# EAGLE board garden_circ (EAGLE 6.4)
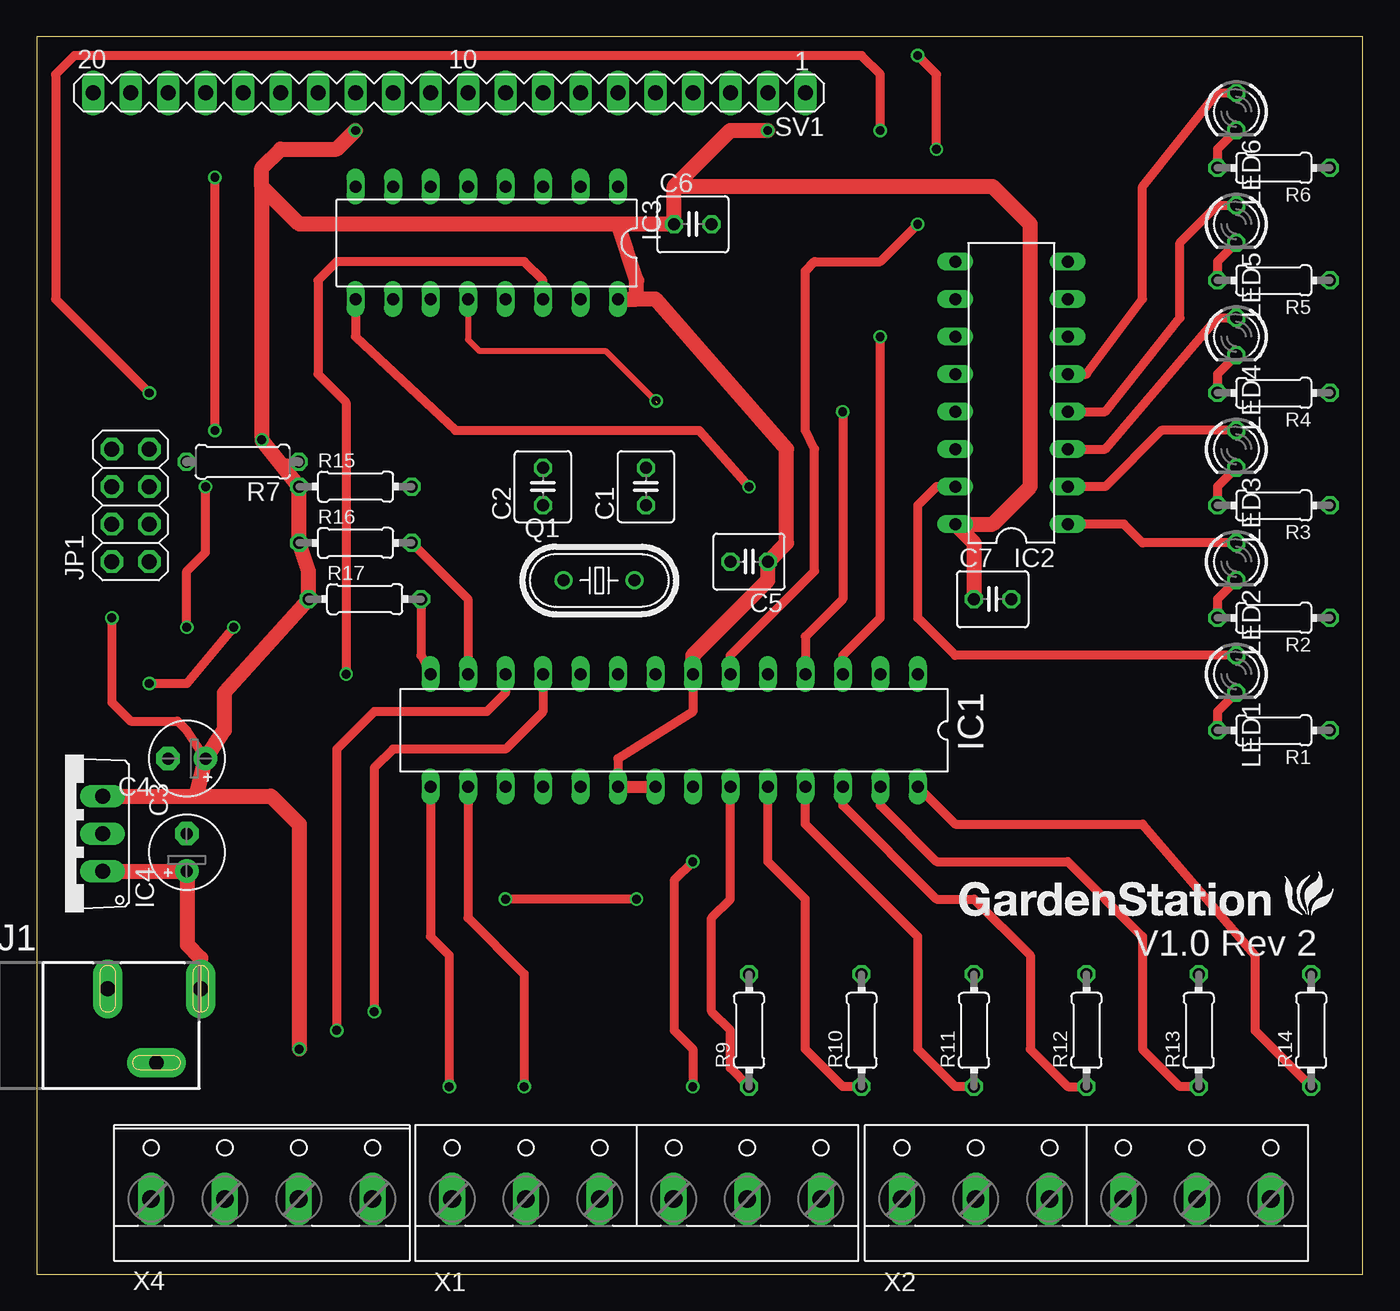
[diagram p0: board, top side]
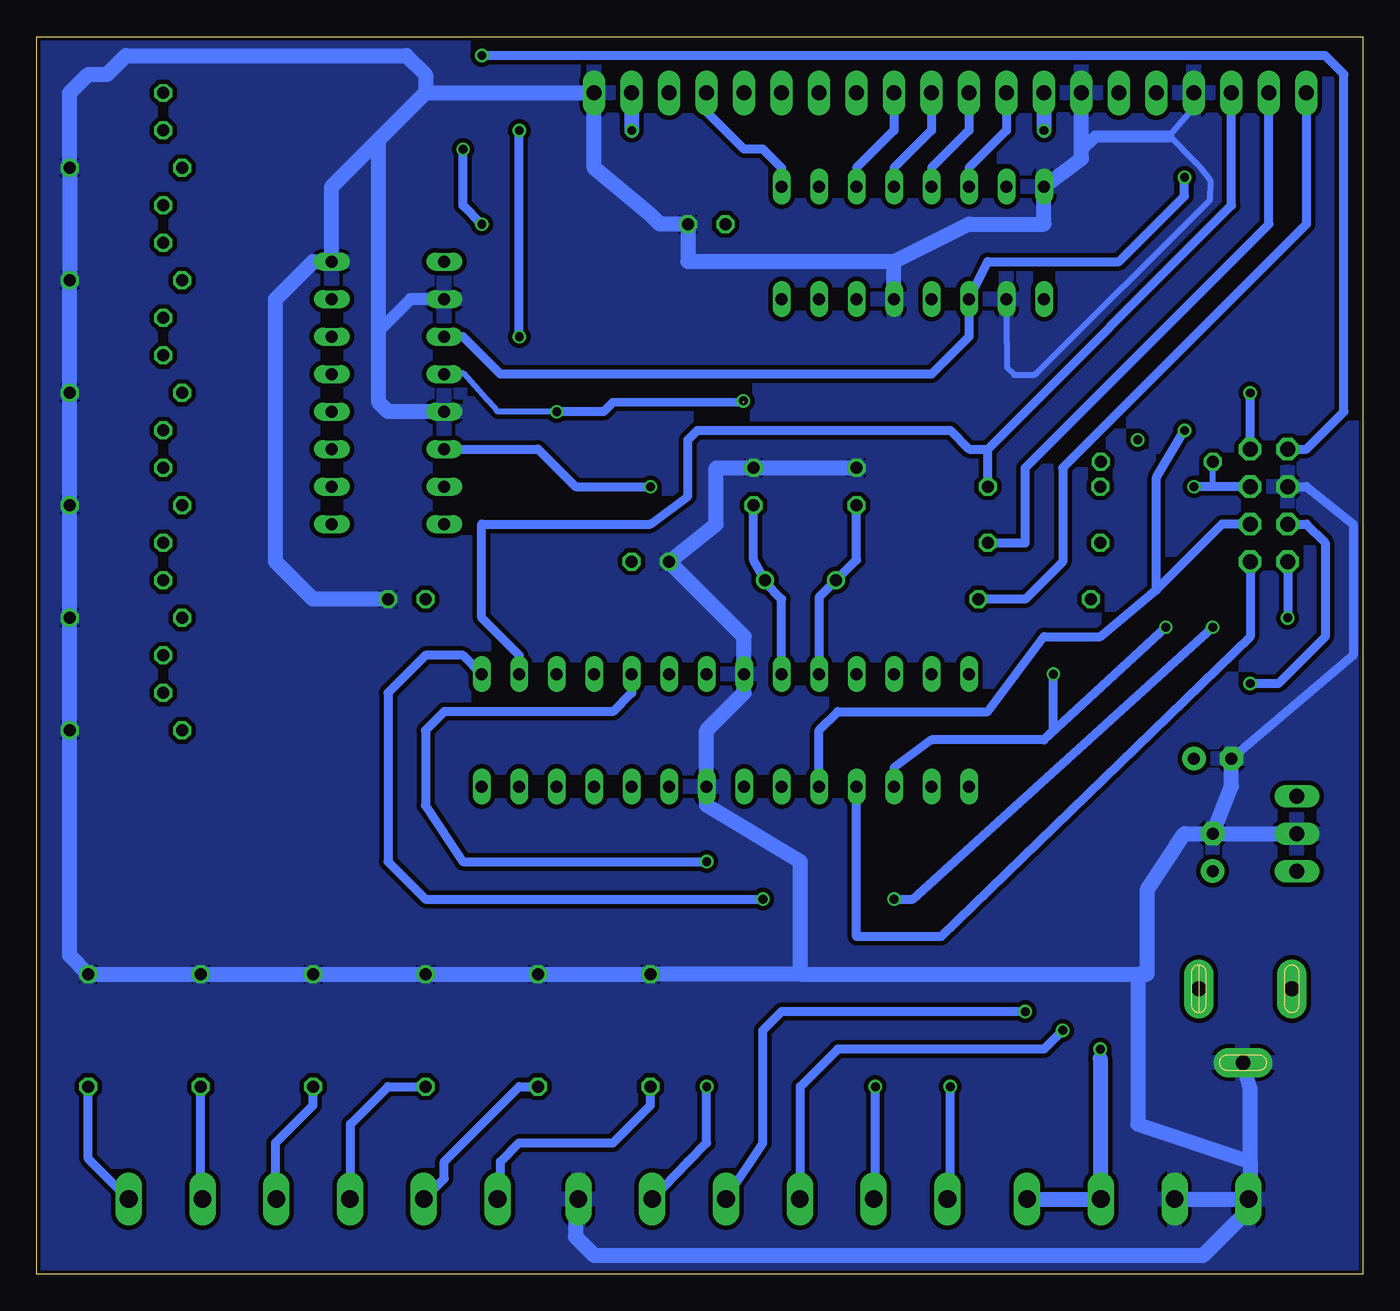
[diagram p1: board, bottom side, seen from below]

Size 89.84 x 83.81 mm. Coordinates in mm from the lower left corner, seen from the top.
Outline: 0,0 89.84,0 89.84,83.81 0,83.81 0,0
Copper layers (1*2*15*16): Top 0.035mm / dielectric 0.2mm / layer 2 0.0175mm / dielectric 1.1mm / layer 15 0.0175mm / dielectric 0.2mm / Bottom 0.035mm
Design rules "seeds_bigger": minimum track width 6mil, minimum drill 12mil, track to track 12mil, track to pad 12mil, pad to pad 12mil, via to via 12mil, smd to smd 0mil, copper to edge 10mil, drill to drill 10mil, minimum pad ring 6mil, minimum via ring 6mil, stop-mask expansion 2mil, vias tented up to drill 25mil, thermal gap 10mil

## Footprints (pad centres in the part's own frame; a part is rotated, then mirrored left to right if it is on the bottom)
C025-040X050 = drill 0.813 octagon: 1 -1.27,0; 2 1.27,0
E2,5-5 = drill 0.813 pad 1.6: + -1.27,0 | drill 0.813 pad 1.6 octagon: - 1.27,0
DIL28-3 = drill 0.813 long: 1 -16.51,-3.81; 2 -13.97,-3.81; 3 -11.43,-3.81; 4 -8.89,-3.81; 5 -6.35,-3.81; 6 -3.81,-3.81; 7 -1.27,-3.81; 8 1.27,-3.81; 9 3.81,-3.81; 10 6.35,-3.81; 11 8.89,-3.81; 12 11.43,-3.81; 13 13.97,-3.81; 14 16.51,-3.81; 15 16.51,3.81; 16 13.97,3.81; 17 11.43,3.81; 18 8.89,3.81; 19 6.35,3.81; 20 3.81,3.81; 21 1.27,3.81; 22 -1.27,3.81; 23 -3.81,3.81; 24 -6.35,3.81; 25 -8.89,3.81; 26 -11.43,3.81; 27 -13.97,3.81; 28 -16.51,3.81
DIL16 = drill 0.813 long: 1 -8.89,-3.81; 2 -6.35,-3.81; 3 -3.81,-3.81; 4 -1.27,-3.81; 5 1.27,-3.81; 6 3.81,-3.81; 7 6.35,-3.81; 8 8.89,-3.81; 9 8.89,3.81; 10 6.35,3.81; 11 3.81,3.81; 12 1.27,3.81; 13 -1.27,3.81; 14 -3.81,3.81; 15 -6.35,3.81; 16 -8.89,3.81
TO220V = drill 1.016 long: 1 -2.54,-2.54; 2 0,-2.54; 3 2.54,-2.54
POWER_JACK_SLOT = drill 1 pad 2 long: GND@1 2.58,7.5; GND@2 7.58,10.8; PWR 2.58,13.8
2X04 = drill 1.016 octagon: 1 -3.81,-1.27; 2 -3.81,1.27; 3 -1.27,-1.27; 4 -1.27,1.27; 5 1.27,-1.27; 6 1.27,1.27; 7 3.81,-1.27; 8 3.81,1.27
LED3MM = drill 0.813 octagon: A -1.27,0; K 1.27,0
HC49U-V = drill 0.813: 1 -2.413,0; 2 2.413,0
0204/7 = drill 0.813 octagon: 1 -3.81,0; 2 3.81,0
0207/7 = drill 0.813 octagon: 1 -3.81,0; 2 3.81,0
MA20-1 = drill 1.016 long: 1 -24.13,0; 2 -21.59,0; 3 -19.05,0; 4 -16.51,0; 5 -13.97,0; 6 -11.43,0; 7 -8.89,0; 8 -6.35,0; 9 -3.81,0; 10 -1.27,0; 11 1.27,0; 12 3.81,0; 13 6.35,0; 14 8.89,0; 15 11.43,0; 16 13.97,0; 17 16.51,0; 18 19.05,0; 19 21.59,0; 20 24.13,0
W237-136 = drill 1.194 long: 1 -12.5,-1.27; 2 -7.5,-1.27; 3 -2.5,-1.27; 4 2.5,-1.27; 5 7.5,-1.27; 6 12.5,-1.27
W237-4 = drill 1.194 long: 1 -7.5,-1.27; 2 -2.5,-1.27; 3 2.5,-1.27; 4 7.5,-1.27

## Placement (x,y rotation side)
C1  22pF  [C025-040X050]  41.28,53.34 90 top
C2  22pF  [C025-040X050]  34.29,53.34 90 top
C3  0.33uF  [E2,5-5]  10.16,28.57 90 top
C4  0.1uF  [E2,5-5]  10.16,34.92 180 top
C5  0.1uF  [C025-040X050]  48.26,48.26 180 top
C6  0.1uF  [C025-040X050]  44.45,71.12 0 top
C7  0.1uF  [C025-040X050]  64.77,45.72 0 top
IC1  MEGA8-P  [DIL28-3]  43.18,36.83 180 top
IC2  74HC595N  [DIL16]  66.04,59.69 90 top
IC3  74HC595N  [DIL16]  30.48,69.85 180 top
IC4  7805TV  [TO220V]  1.91,29.84 90 top
J1  POWER_JACKSLT  [POWER_JACK_SLOT]  -2.7,21.9 270 top
JP1  [2X04]  6.35,52.07 90 top
LED1  [LED3MM]  81.28,40.64 270 top
LED2  [LED3MM]  81.28,48.26 270 top
LED3  [LED3MM]  81.28,55.88 270 top
LED4  [LED3MM]  81.28,63.5 270 top
LED5  [LED3MM]  81.28,71.12 270 top
LED6  [LED3MM]  81.28,78.74 270 top
Q1  [HC49U-V]  38.1,46.99 0 top
R1  220  [0204/7]  83.82,36.83 180 top
R2  220  [0204/7]  83.82,44.45 180 top
R3  220  [0204/7]  83.82,52.07 180 top
R4  220  [0204/7]  83.82,59.69 180 top
R5  220  [0204/7]  83.82,67.31 180 top
R6  220  [0204/7]  83.82,74.93 180 top
R7  10K  [0207/7]  13.94,55.03 180 top
R9  10K  [0204/7]  48.26,16.51 90 top
R10  10K  [0204/7]  55.88,16.51 90 top
R11  10K  [0204/7]  63.5,16.51 90 top
R12  10K  [0204/7]  71.12,16.51 90 top
R13  10K  [0204/7]  78.74,16.51 90 top
R14  10K  [0204/7]  86.36,16.51 90 top
R15  10K  [0204/7]  21.59,53.34 0 top
R16  10K  [0204/7]  21.59,49.53 0 top
R17  10K  [0204/7]  22.22,45.72 0 top
SV1  [MA20-1]  27.94,80.01 180 top
X1  [W237-136]  40.64,6.35 0 top
X2  [W237-136]  71.12,6.35 0 top
X4  [W237-4]  15.24,6.35 0 top

## Library data of the parts
C1 C2 C5-C7 R1-R6 R9-R17 = rcl
C3 C4 R7 = resistor
IC1 = atmel; OC_FARNELL: unknown; OC_NEWARK: unknown
IC2 IC3 = 74xx-eu
IC4 = linear
J1 = SparkFun-Connectors
JP1 = pinhead
LED1-LED6 = led
Q1 = crystal; OC_FARNELL: 1666969; OC_NEWARK: unknown
SV1 = con-lstb; OC_FARNELL: unknown; OC_NEWARK: unknown
X1 X2 = con-wago-500; MPN: 237-136; OC_FARNELL: unknown; OC_NEWARK: 84K9151
X4 = con-wago-500; OC_FARNELL: unknown; OC_NEWARK: unknown

## Nets
GND: C1.2 C2.2 C3.- C4.- C5.2 C6.2 C7.2 IC1.8 IC1.22 IC2.8 IC2.10 IC2.13 IC3.8 IC3.10 IC3.13 IC4.2 J1.GND@2 JP1.6 R1.1 R2.1 R3.1 R4.1 R5.1 R6.1 R9.2 R10.2 R11.2 R12.2 R13.2 R14.2 SV1.1 SV1.14 SV1.17 X1.6 X4.1 X4.2
N$1: C1.1 IC1.9 Q1.2
N$2: C2.1 IC1.10 Q1.1
N$3: LED1.K R1.2
N$4: LED2.K R2.2
N$5: LED3.K R3.2
N$6: LED4.K R4.2
N$7: LED5.K R5.2
N$8: LED6.K R6.2
N$9: IC1.18 JP1.1
N$10: IC1.1 JP1.5 R7.2
N$11: IC2.15 LED1.A
N$12: IC2.1 LED2.A
N$13: IC2.2 LED3.A
N$14: IC2.3 LED4.A
N$15: IC1.11 X1.4
N$16: IC2.4 LED5.A
N$17: IC2.5 LED6.A
N$19: IC1.6 JP1.8
N$20: IC1.19 IC2.11 IC3.11 JP1.3
N$21: IC2.14 IC3.9
N$23: IC1.12 X1.3
N$24: IC1.15 X1.1
N$25: IC1.24 R10.1 X2.2
N$26: IC3.3 SV1.9
N$27: IC3.1 SV1.4
N$28: IC3.4 SV1.10
N$29: IC3.5 SV1.11
N$30: IC3.6 SV1.12
N$31: IC1.23 R9.1 X2.1
N$32: IC1.25 R11.1 X2.3
N$33: IC1.26 R12.1 X2.4
N$34: IC1.27 R13.1 X2.5
N$35: IC1.28 R14.1 X2.6
N$36: IC1.16 X1.2
N$37: C3.+ IC4.1 J1.PWR
N$39: IC1.2 R15.2 SV1.18
N$40: IC1.13 R16.2 SV1.19
N$41: IC1.14 R17.2 SV1.20
N$42: IC1.5 X1.5
N$44: IC1.17 IC3.14 JP1.4
N$45: IC1.3 JP1.7
N$52: IC1.4 IC2.12 IC3.12
VCC: C4.+ C5.1 C6.1 C7.1 IC1.7 IC1.20 IC1.21 IC2.16 IC3.16 IC4.3 JP1.2 R7.1 R15.1 R16.1 R17.1 SV1.2 SV1.13 X4.3 X4.4

## Tracks (layer width: path | path; a pad name or v marks a point on that pad's centre or on a via)
GND
  Bottom 0.406: 11.43,79.06 13.1,77.1 | 13.1,77.1 13.16,77.06 | IC3.10 24.13,63.08 24.1,63.05 24.1,61.41 23.6,60.91 22.25,60.91 22.14,61.02 22.11,61.02 10.34,72.79 10.3,74.07 10.9,74.85 11.26,75.26 13.1,77.1
  Bottom 0.61: JP1.6 3.81,53.34 0.64,50.8 0.64,41.91 C4.-
  Bottom 0.813: 13.16,77.06 18.12,77.06 19.05,76.13 | IC2.10 64.52,66.04 66.67,63.88
  Bottom 1.016: 38.1,20.32 R9.2 R10.2 R11.2 R12.2 R13.2 R14.2 87.63,21.59 R1.1 R2.1 R3.1 R4.1 R5.1 R6.1 87.63,80.01 86.36,81.28 85.09,81.28 83.82,82.55 64.77,82.55 63.5,81.28 63.5,80.01 | 38.1,20.32 15.1,20.32 | 15.1,20.32 14.61,20.32 14.61,26.04 12.07,29.84 C3.- | C3.- IC4.2 | C3.- 8.89,33.02 C4.- | C2.2 C1.2 43.82,54.61 43.82,50.8 C5.2 41.91,43.18 IC1.8 41.91,39.37 44.45,36.83 IC1.22 44.45,31.75 38.1,27.94 38.1,20.32 | 31.75,68.58 26.67,71.12 21.59,71.12 IC3.8 19.05,75.56 19.05,76.13 SV1.14 | 7.62,7.62 15.24,10.16 15.24,20.18 15.1,20.32 | X1.6 53.34,4.88 53.34,2.54 52.07,1.27 10.79,1.27 7.62,4.45 7.62,4.96 X4.1 | 66.67,76.83 69.85,73.66 IC2.8 71.12,68.58 73.66,66.04 73.66,48.26 71.12,45.72 C7.2 | 66.67,76.83 63.5,80.01 | 63.5,80.01 SV1.1 52.07,74.93 48.26,71.75 47.62,71.12 C6.2 45.72,68.58 31.75,68.58 | IC2.13 66.04,58.42 66.67,59.05 66.67,63.88 66.67,76.83 | IC3.13 31.75,68.58 | 7.62,7.62 7.62,5.2 X4.1 | X4.2 X4.1 | SV1.17 11.43,79.06 | 7.62,7.62 7.62,12.56 J1.GND@2
  pour Bottom: 0,83.82 0,0 89.53,0 89.53,83.82
N$1
  Bottom 0.61: IC1.9 39.37,45.72 40.51,46.86 Q1.2 41.28,48.39 C1.1
N$2
  Bottom 0.61: IC1.10 36.83,45.85 Q1.1 34.29,48.39 C2.1
N$3
  Top 0.61: LED1.K 80.01,38.1 R1.2
N$4
  Top 0.61: LED2.K 80.01,45.72 R2.2
N$5
  Top 0.61: LED3.K 80.01,53.34 R3.2
N$6
  Top 0.61: LED4.K 80.01,60.96 R4.2
N$7
  Top 0.61: LED5.K 80.01,68.58 R5.2
N$8
  Top 0.61: LED6.K 80.01,76.2 R6.2
N$9
  Bottom 0.61: JP1.1 7.62,43.18 28.57,22.86 34.29,22.86 IC1.18
N$10  (via drill 0.6)
  Top 0.61: v40.64,25.4 v31.75,25.4 | v10.16,43.81 10.16,47.62 11.43,48.9 v11.43,53.34
  Bottom 0.406: R7.2 10.18,55.03 10.18,53.34
  Bottom 0.61: IC1.1 60.96,41.91 63.5,41.91 66.04,39.37 66.04,27.94 63.5,25.4 v40.64,25.4 | v31.75,25.4 30.48,25.4 v10.16,43.81 | JP1.5 10.18,53.34 v11.43,53.34
N$11
  Top 0.61: LED1.A 62.23,41.91 59.69,44.45 59.69,52.07 60.96,53.34 IC2.15
N$12
  Top 0.61: LED2.A 74.93,49.53 73.66,50.8 IC2.1
N$13
  Top 0.61: LED3.A 76.2,57.15 72.39,53.34 IC2.2
N$14
  Top 0.61: IC2.3 72.39,55.88 80.01,64.77 LED4.A
N$15  (via drill 0.6)
  Top 0.61: IC1.11 34.29,38.1 31.75,35.56 24.13,35.56 22.86,34.29 v22.86,17.78
  Bottom 0.61: X1.4 43.18,5.12 40.64,8.89 40.64,16.51 39.37,17.78 v22.86,17.78
N$16
  Top 0.61: IC2.4 72.39,58.42 77.47,64.77 77.47,69.85 80.01,72.39 LED5.A
N$17
  Top 0.61: IC2.5 71.12,60.96 74.93,66.04 74.93,73.66 80.01,80.01 LED6.A
N$19  (via drill 0.6)
  Top 0.61: IC1.6 46.99,41.91 52.71,47.62 52.71,55.88 52.07,57.15 52.07,67.94 52.71,68.58 57.15,68.58 v59.69,71.12 | v60.96,76.2 60.96,81.28 v59.69,82.55
  Bottom 0.61: JP1.8 3.81,55.88 1.27,58.42 1.27,81.28 2.54,82.55 v59.69,82.55 | v59.69,71.12 60.96,72.39 v60.96,76.2
N$20  (via drill 0.6)
  Top 0.61: v12.07,57.15 v12.07,74.3
  Bottom 0.61: IC2.11 60.96,63.5 58.42,60.96 29.21,60.96 26.67,63.5 IC3.11 25.4,68.58 16.51,68.58 12.07,73.03 v12.07,74.3 | IC1.19 36.83,36.83 35.56,38.1 25.4,38.1 21.59,43.18 17.78,43.18 13.97,46.35 | v12.07,57.15 13.97,53.98 13.97,46.35 | JP1.3 9.53,50.8 13.97,46.35
N$21  (via drill 0.6)
  Top 0.61: IC3.9 21.59,63.5 28.37,57.15 44.88,57.15 v48.26,53.34
  Bottom 0.61: IC2.14 55.88,55.88 53.34,53.34 v48.26,53.34
N$23  (via drill 0.6)
  Top 0.61: IC1.12 31.75,39.37 30.48,38.1 22.86,38.1 20.32,35.56 v20.32,16.51
  Bottom 0.61: X1.3 38.1,5.12 38.1,12.7 35.56,15.24 21.59,15.24 v20.32,16.51
N$24  (via drill 0.6)
  Top 0.61: IC1.15 26.67,22.86 27.94,21.59 v27.94,12.7
  Bottom 0.61: X1.1 27.94,5.28 v27.94,12.7
N$25
  Top 0.61: R10.1 54.61,12.7 52.07,15.24 52.07,25.4 49.53,27.94 IC1.24
  Bottom 0.61: X2.2 62.23,6.47 62.23,7.62 57.15,12.7 R10.1
N$26
  Bottom 0.61: SV1.9 31.75,77.47 34.29,74.93 IC3.3
N$27
  Bottom 0.61: IC3.1 39.37,74.93 40.64,76.2 41.91,76.2 44.45,78.74 SV1.4
N$28
  Bottom 0.61: SV1.10 29.21,77.47 31.75,74.93 IC3.4
N$29
  Bottom 0.61: SV1.11 26.67,77.47 29.21,74.93 IC3.5
N$30
  Bottom 0.61: SV1.12 24.13,77.47 26.67,74.93 IC3.6
N$31
  Top 0.61: R9.1 46.99,13.97 46.99,16.51 45.72,17.78 45.72,24.13 46.99,25.4 IC1.23
  Bottom 0.61: X2.1 58.42,5.28 58.42,7.62 57.15,8.89 50.8,8.89 48.26,11.43 R9.1
N$32
  Top 0.61: R11.1 62.23,12.7 59.69,15.24 59.69,22.86 52.07,30.48 IC1.25
  Bottom 0.61: X2.3 68.58,5.12 68.58,10.16 66.04,12.7 R11.1
N$33
  Top 0.61: IC1.26 54.61,31.75 60.96,25.4 63.5,25.4 67.31,21.59 67.31,15.24 69.85,12.7 R12.1
  Bottom 0.61: X2.4 73.66,5.12 73.66,8.89 71.12,11.43 R12.1
N$34
  Top 0.61: R13.1 77.47,12.7 74.93,15.24 74.93,22.86 69.85,27.94 60.96,27.94 57.15,31.75 IC1.27
  Bottom 0.61: X2.5 78.74,5.2 R13.1
N$35
  Top 0.61: IC1.28 62.23,30.48 74.93,30.48 82.55,21.59 82.55,16.51 R14.1
  Bottom 0.61: X2.6 86.36,7.82 R14.1
N$36  (via drill 0.6)
  Top 0.61: IC1.16 29.21,24.13 33.02,20.32 v33.02,12.7
  Bottom 0.61: X1.2 33.02,5.2 v33.02,12.7
N$37
  Top 1.016: IC4.1 C3.+ 10.21,27.25 10.21,22.3 11.1,21.4 J1.PWR
N$38  (via drill 0.6)
  other vias: 41.97,59.15
N$39
  Bottom 0.61: R15.2 25.4,55.88 | 25.4,55.88 8.89,72.39 SV1.18 | IC1.2 57.15,41.91 59.69,44.45 59.69,50.8 48.26,50.8 45.72,52.7 45.72,56.52 45.09,57.15 27.94,57.15 26.67,55.88 25.4,55.88
N$40
  Top 0.61: R16.2 29.21,45.72 IC1.13
  Bottom 0.61: R16.2 22.86,49.53 22.86,54.61 6.35,71.12 SV1.19
N$41
  Top 0.61: R17.2 26.04,41.91 IC1.14
  Bottom 0.61: SV1.20 3.81,71.12 20.32,54.61 20.32,48.26 22.86,45.72 R17.2
N$42  (via drill 0.6)
  Top 0.61: v44.45,27.94 43.18,26.67 43.18,16.51 44.45,15.24 v44.45,12.7
  Bottom 0.61: X1.5 45.72,7.62 44.45,8.89 v44.45,12.7 | IC1.5 49.53,39.37 50.8,38.1 62.23,38.1 63.5,36.83 63.5,31.75 60.96,27.94 v44.45,27.94
N$44  (via drill 0.6)
  Top 0.61: IC3.14 34.29,67.31 33.02,68.58 20.32,68.58 19.05,67.31 19.05,60.96 20.95,59.05 v20.95,40.64 | v13.34,43.81 10.16,40.01 v7.62,40.01
  Bottom 0.61: v13.34,43.81 21.59,36.2 | 21.59,36.2 29.21,36.2 31.75,34.29 IC1.17 | 21.59,36.2 20.95,36.83 v20.95,40.64 | JP1.4 3.81,50.8 2.54,49.53 2.54,43.18 5.71,40.01 v7.62,40.01
N$45  (via drill 0.6)
  Top 0.61: IC1.3 54.61,41.91 57.15,44.45 v57.15,63.5 | v57.15,77.47 57.15,81.28 55.88,82.55 2.54,82.55 1.27,81.28 1.27,66.04 v7.62,59.69
  Bottom 0.61: JP1.7 v7.62,59.69 | v57.15,63.5 v57.15,77.47
N$52  (via drill 0.6)  (1 unrouted)
  Top 0.406: IC3.12 29.21,63.3 29.98,62.53 38.52,62.53 41.96,59.14
  Top 0.61: 54.6,58.31 54.49,58.55 v54.61,58.42 54.61,45.72 52.07,43.18 IC1.4
  Bottom 0.406: v54.61,58.42 58.62,58.42 58.77,58.62 59.36,59.26 60.94,61.02 62.17,61.02 IC2.12
  Bottom 0.61: 41.96,59.07 41.98,59.02 50.8,59.05 51.44,58.42 v54.61,58.42
VCC  (via drill 0.6)
  Top 0.406: R7.1 16.72,55.03 16.72,54.66
  Top 0.61: IC1.7 44.45,38.1 39.37,34.92 IC1.20 | v5.08,44.45 5.08,38.73 6.35,37.47 9.53,37.47 10.16,36.83 C4.+
  Top 0.813: IC1.20 IC1.21
  Top 1.016: IC4.3 10.79,32.38 | 10.79,32.38 C4.+ 12.7,36.83 12.7,39.37 R17.1 18.41,47.62 R16.1 R15.1 16.72,54.66 v15.24,56.52 15.24,73.66 | 39.37,71.12 40.64,67.31 40.64,66.04 | 39.37,71.12 17.78,71.12 15.24,73.66 | IC3.16 40.64,66.04 | 40.64,66.04 41.91,66.04 50.8,55.88 50.8,49.53 C5.1 49.53,46.99 44.45,41.91 IC1.7 | 43.18,73.66 46.99,77.47 v49.53,77.47 | 43.18,73.66 64.77,73.66 67.31,71.12 67.31,53.34 64.77,50.8 IC2.16 63.5,49.53 C7.1 | 15.24,73.66 15.24,74.93 16.51,76.2 20.32,76.2 v21.59,77.47 | 43.18,73.66 C6.1 39.37,71.12 | 10.79,32.38 15.88,32.38 17.78,30.48 v17.78,15.24
  Bottom 0.61: 17.78,14.61 v17.78,15.24 | JP1.2 v5.08,44.45
  Bottom 1.016: SV1.2 v49.53,77.47 | SV1.13 v21.59,77.47 | 17.78,14.61 17.78,5.12 X4.3 X4.4

## Text on the board
tPlace: V1.0 Rev 2